# Altium PCB Copy of DigitalLabBoard_Jig_Milling.PcbDoc
Units mil, origin at the board's own origin, x right, y up, seen from the top; angles counter-clockwise.
Board outline 6102.36 x 4133.86 mil, 2 copper layers (Top Layer, Bottom Layer), stack 61.855 mil thick; 17 components, 0 nets, 110 pads, 0 vias.
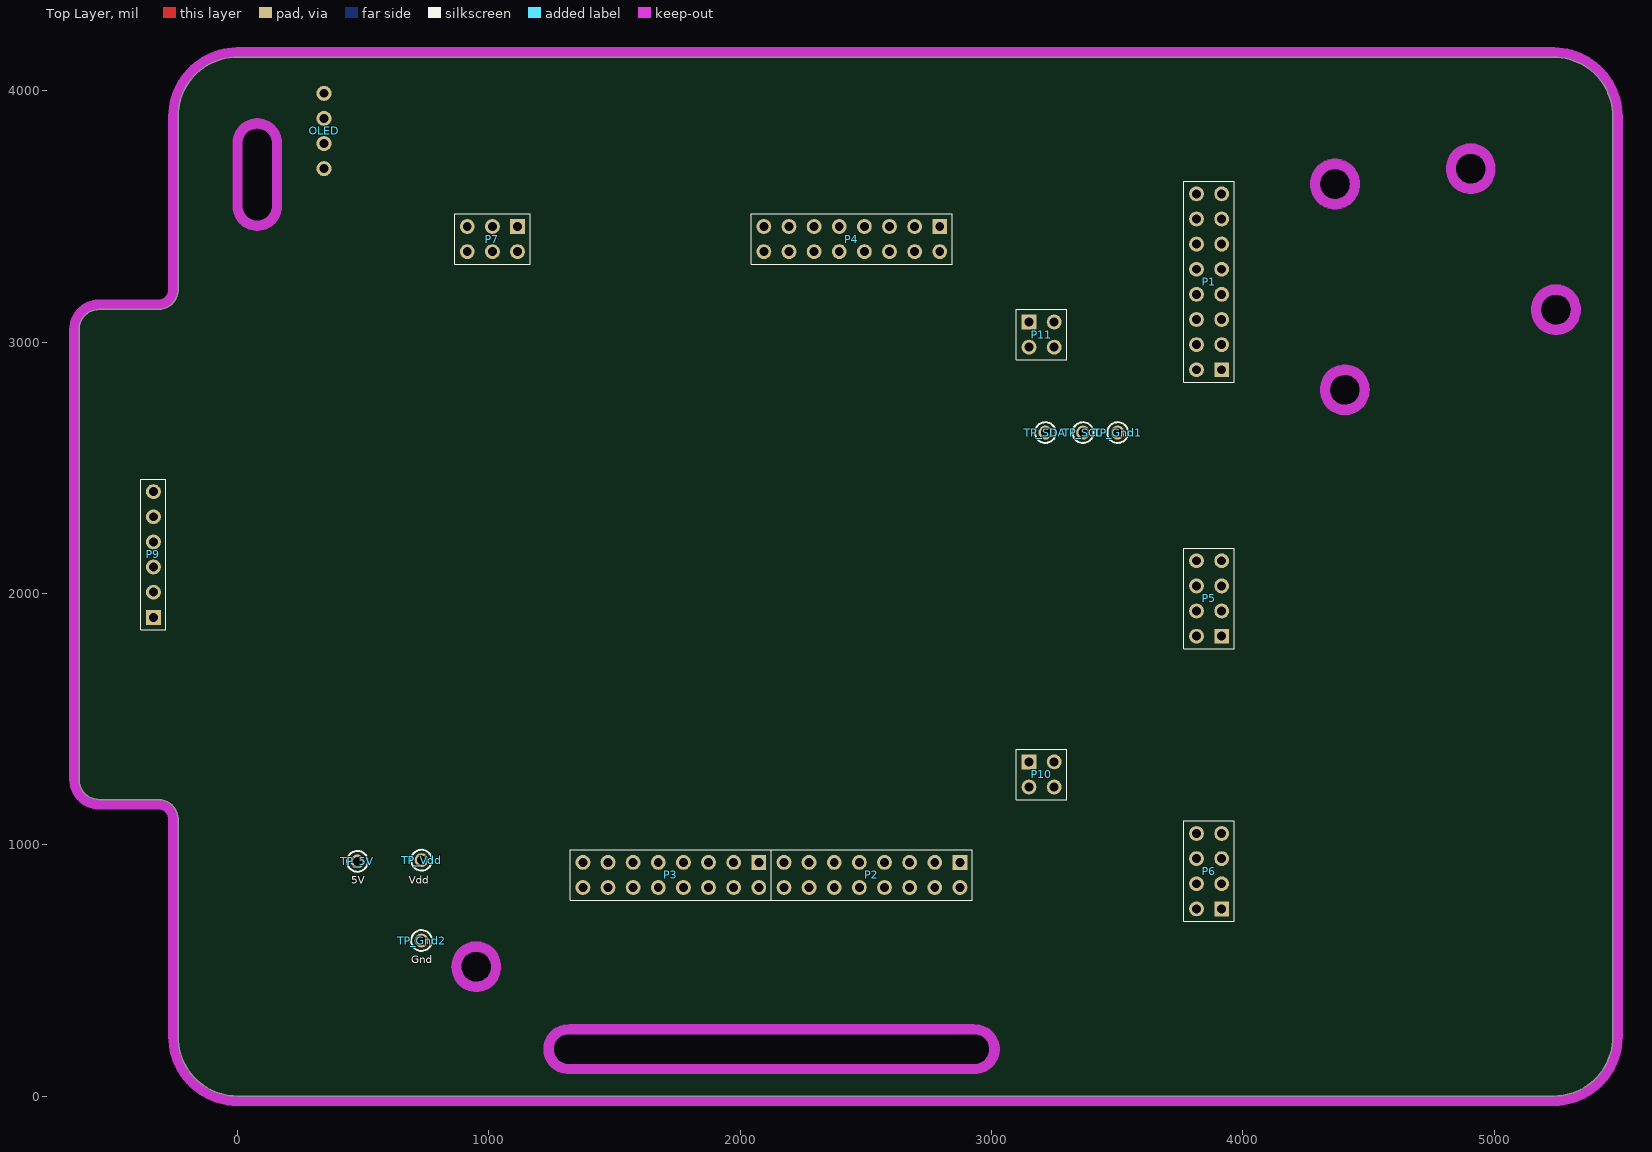
[diagram p0: Top Layer view]
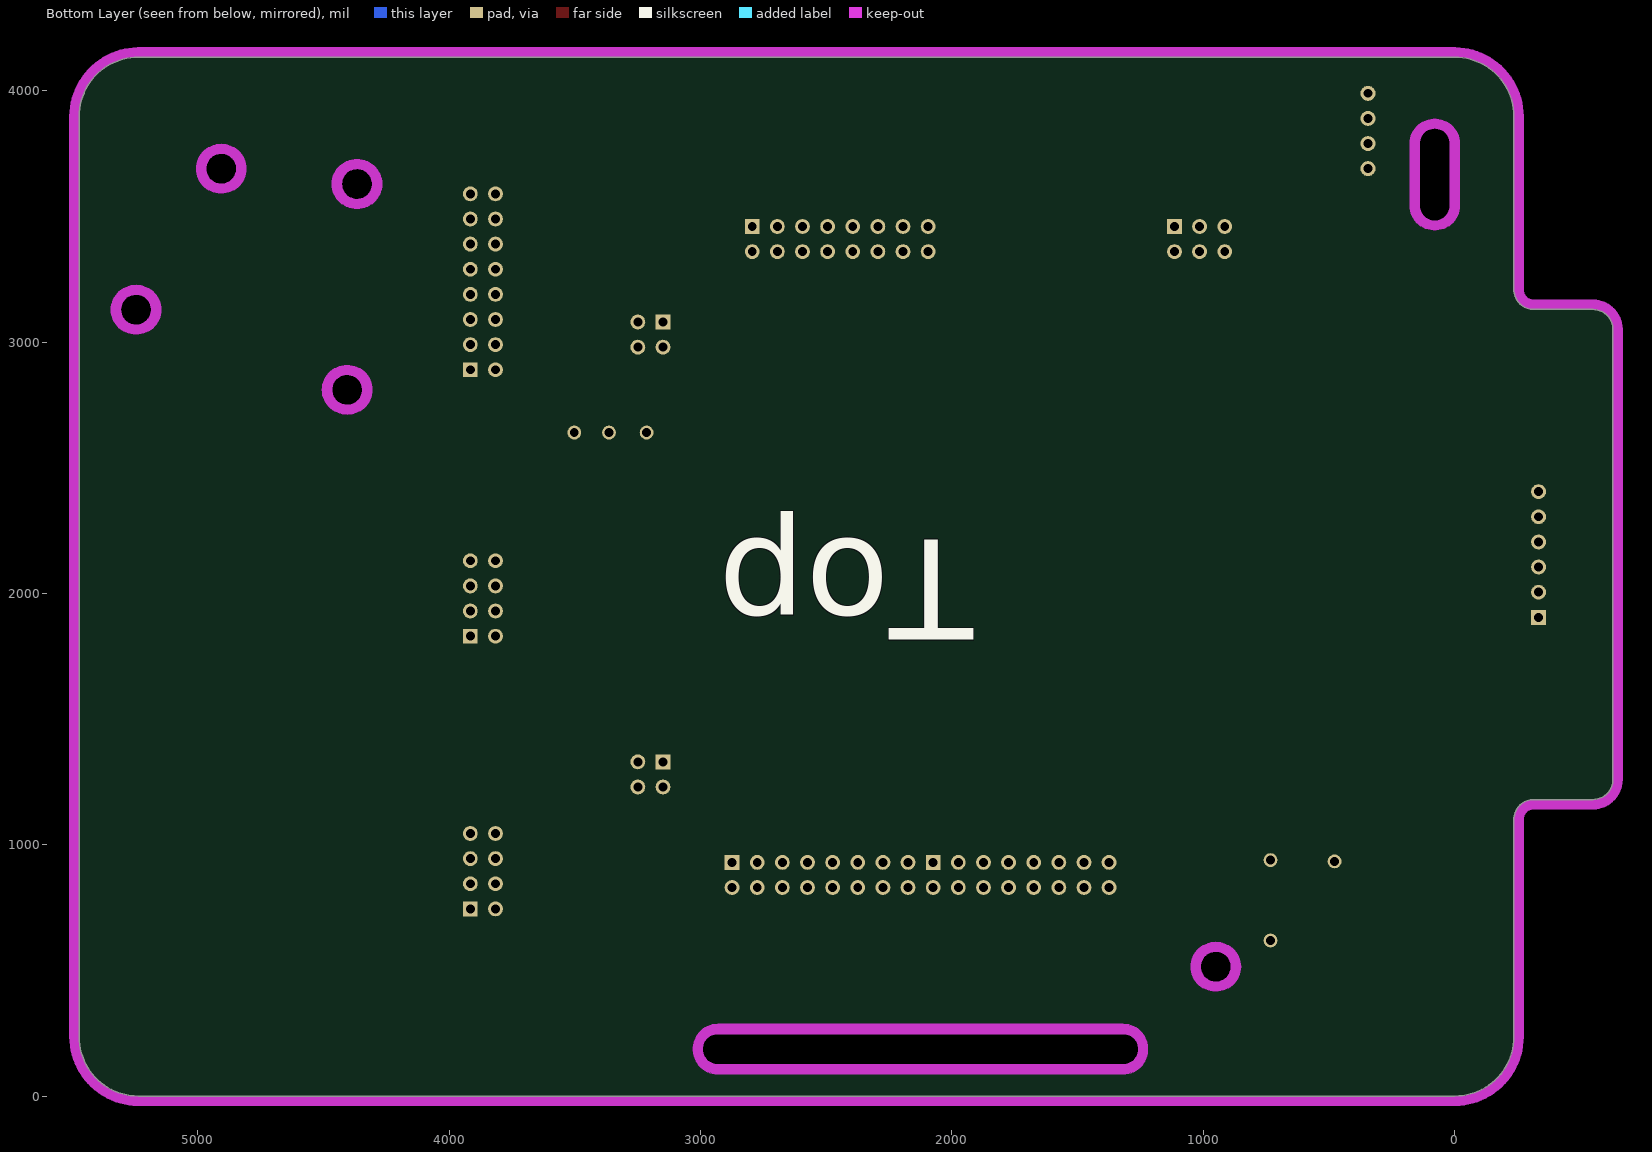
[diagram p1: Bottom Layer view, seen from below]

## Layer stack, top to bottom
Top Solder: solder mask 0.4, Solder Resist, Dk 3.5
Top Layer: signal copper 1.4
Dielectric 1: dielectric 59.0551, FR-4, Dk 4.8
Bottom Layer: signal copper 1.4
Bottom Solder: solder mask 0.4, Solder Resist, Dk 3.5

## Board outline
-236.22,236.22 -236.22,1101.26 ccw(c-314.96,1101.26) -314.96,1180 -551.18,1180 cw(c-551.18,1258.74) -629.92,1258.74 -629.92,3051.18 cw(c-551.18,3051.18) -551.18,3129.92 -314.96,3129.92 ccw(c-314.96,3208.66) -236.22,3208.66 -236.22,3897.64 cw(c0,3897.64) 0,4133.86 0,4133.81 5236.22,4133.81 cw(c5236.22,3897.59) 5472.44,3897.59 5472.44,236.22 cw(c5236.22,236.22) 5236.22,0 0,0 cw(c0,236.22)
cut-out: -19.68,3543.31 ccw(c78.74,3543.31) 177.17,3543.31 177.17,3789.96 ccw(c78.74,3789.96) -19.68,3789.96
cut-out: 1318,88.57 cw(c1318,187) 1318,285.43 2932,285.43 cw(c2932,187) 2932,88.57
cut-out: 4307.57,2810 ccw(c4406,2810) 4406,2711.57 ccw(c4406,2810) 4504.43,2810 ccw(c4406,2810) 4406,2908.43 ccw(c4406,2810)
cut-out: 5147.57,3129 ccw(c5246,3129) 5246,3030.57 ccw(c5246,3129) 5344.43,3129 ccw(c5246,3129) 5246,3227.43 ccw(c5246,3129)
cut-out: 4808.57,3690 ccw(c4907,3690) 4907,3591.57 ccw(c4907,3690) 5005.43,3690 ccw(c4907,3690) 4907,3788.43 ccw(c4907,3690)
cut-out: 4268.57,3629 ccw(c4367,3629) 4367,3530.57 ccw(c4367,3629) 4465.43,3629 ccw(c4367,3629) 4367,3727.43 ccw(c4367,3629)
cut-out: 851.57,515 ccw(c950,515) 950,416.57 ccw(c950,515) 1048.43,515 ccw(c950,515) 950,613.43 ccw(c950,515)

## Design rules (kind name [scope] priority, off if disabled: settings)
BoardOutlineClearance [All] p1: gap=15 ignorepadtopadclearanceinfootprint=FALSE
Clearance [All] p1: gap=5 ignorepadtopadclearanceinfootprint=FALSE
DiffPairsRouting [All] p1: maxlimit=5 minlimit=5 mostfreqgap=5 toplayer_minwidth=10 toplayer_maxwidth=10 toplayer_prefwidth=10 bottomlayer_minwidth=10 bottomlayer_maxwidth=10 bottomlayer_prefwidth=10 maxuncoupledlength=500
HoleSize [All] p1: absolutevalues=TRUE maxlimit=787.4 minlimit=9.84 maxpercent=80.000 minpercent=20.000
MinimumAnnularRing [All] p1: minimumring=3.5
MinimumSolderMaskSliver [All] p1 off: minsoldermaskwidth=10
PolygonConnect PolygonConnect_Via [IsVia] p1: connectstyle=Direct reliefconductorwidth=10 reliefentries=4 polygonreliefangle="90 Angle" airgapwidth=10
PolygonConnect [All] p2: connectstyle=Relief reliefconductorwidth=10 reliefentries=4 polygonreliefangle="90 Angle" airgapwidth=10
RoutingVias [All] p1: holewidth=28 width=50 viastyle="Through Hole" minholewidth=28 minwidth=50 maxholewidth=28 maxwidth=50
SilkToSilkClearance [All] p1 off: silktosilkclearance=10
SilkToSolderMaskClearance [IsPad] p1 off: minsilkscreentomaskgap=10 clearancetoexposedcopper=TRUE
SolderMaskExpansion [All] p1: expansion=4
Width [All] p1: maxlimit=30 minlimit=10 preferedwidth=10
25 further rules are at their usual default settings.

## Classes and differential pairs
differential pair USBD_R: +"" -""
differential pair USBD: +"" -""

## Components (designator, comment, footprint, x,y, rotation, side; value= is the part's Value field where it differs from the comment)
OLED "OLED_Display" OLED_DISPLAY_128X32 344.42,3989.96 r0 top locked
P1 "Header 2x8" HDR2X8S 3915.99,2889.96 r90 top locked
P2 "Header 2x8" HDR2X8S 2874.42,929.96 r180 top locked
P3 "Header 2x8" HDR2X8S 2074.42,929.96 r180 top locked
P4 "Header 2x8" HDR2X8S 2794.42,3459.96 r180 top locked
P5 "Header 2x4" HDR2X4S 3915.99,1829.96 r90 top locked
P6 "Header 2x4" HDR2X4S 3915.99,744.96 r90 top locked
P7 "Header 2x3" HDR2X3S 1114.42,3459.96 r180 top locked
P9 "Header, 6-Pin" HDR1X6S -334.33,1904.96 r90 top locked
P10 "Header 2x2" HDR2X2S 3149.42,1329.96 r270 top locked
P11 "Header 2x2" HDR2X2S 3149.42,3079.96 r270 top locked
TP_5V "5V" "PCBPIN - 0.9mm" 477.42,933.96 r0 top
TP_Gnd1 "Gnd" "PCBPIN - 0.9mm" 3502.33,2640 r90 top locked
TP_Gnd2 "Gnd" "PCBPIN - 0.9mm" 732.42,618.96 r0 top
TP_SCL "SCL" "PCBPIN - 0.9mm" 3364.42,2640 r90 top locked
TP_SDA "SDA" "PCBPIN - 0.9mm" 3214.42,2640 r90 top locked
TP_Vdd "Vdd" "PCBPIN - 0.9mm" 732.42,938.96 r90 top

## Footprints (in the part's own frame and the unit in brackets; to place one, negate y for a bottom-side part, rotate by r counter-clockwise, add the part's x,y. Pads: shape width x height; smd on the part's side, far side on the other; paste and mask are expansions set on the pad)
HDR1X6S [mm] "Header; 6 Position; Straight"
  rect 1.5x1.5 hole 0.9: 1(0,0)
  round 1.5 hole 0.9: 2(2.54,0) 3(5.08,0) 4(7.62,0) 5(10.16,0) 6(12.7,0)
  silkscreen extent -1.27,-1.27 13.97,1.27, body extent -1.27,-1.27 13.97,1.27, height 6
HDR2X2S [mm] "Header; 2x2 Position; Straight"
  rect 1.5x1.5 hole 0.9: 1(0,0)
  round 1.5 hole 0.9: 2(0,2.54) 3(2.54,0) 4(2.54,2.54)
  silkscreen extent -1.27,-1.27 3.81,3.81, body extent -1.27,-1.27 3.81,3.81, height 6
HDR2X3S [mm] "Connector; Header; 2x3 Position; Straight"
  rect 1.5x1.5 hole 0.9: 1(0,0)
  round 1.5 hole 0.9: 2(0,2.54) 3(2.54,0) 4(2.54,2.54) 5(5.08,0) 6(5.08,2.54)
  silkscreen extent -1.27,-1.27 6.35,3.81, body extent -1.27,-1.27 6.35,3.81, height 6
HDR2X4S [mm] "Connector; Header; 2x4 Position; Straight"
  rect 1.5x1.5 hole 0.9: 1(0,0)
  round 1.5 hole 0.9: 2(0,2.54) 3(2.54,0) 4(2.54,2.54) 5(5.08,0) 6(5.08,2.54) 7(7.62,0) 8(7.62,2.54)
  silkscreen extent -1.27,-1.27 8.89,3.81, body extent -1.27,-1.27 8.89,3.81, height 6
HDR2X8S [mm] "Connector; Header; 2x8 Position; Straight"
  rect 1.5x1.5 hole 0.9: 1(0,0)
  round 1.5 hole 0.9: 2(0,2.54) 3(2.54,0) 4(2.54,2.54) 5(5.08,0) 6(5.08,2.54) 7(7.62,0) 8(7.62,2.54) 9(10.16,0) 10(10.16,2.54) 11(12.7,0) 12(12.7,2.54) 13(15.24,0) 14(15.24,2.54) 15(17.78,0) 16(17.78,2.54)
  silkscreen extent -1.27,-1.27 19.05,3.81, body extent -1.27,-1.27 19.05,3.81, height 6
OLED_DISPLAY_128X32 [mil] "Small OLED Display"
  round 60 hole 35.43: 1(0,-300) 2(0,-200) 3(0,-100) 4(0,0)
  body extent -61,-388 1437,86, height 157
"PCBPIN - 0.9mm" [mm]
  round 1.4 hole 0.9: 1(0,0)
  silkscreen extent -1.05,-1.05 1.05,1.05, body extent -1.27,-1.27 1.27,1.27, height 6

## Part data
OLED: "OLED Display 128x32 pixels, I2C interface"
P9: library part "Header 1x6", Digikey=A26512-06-ND, LatestRevisionDate=17-Jul-2002, LatestRevisionNote="Re-released for DXP Platform.", Publisher="Altium Limited"
TP_5V TP_Gnd1 TP_Gnd2 TP_SCL TP_SDA TP_Vdd: library part TP, "Test Point"
P1 P2 P3 P4: Digikey=A26528-08-ND
P5 P6: Digikey=A26528-04-ND
P7: Digikey=A26528-03-ND
P10 P11: Digikey=A26528-02-ND

## Nets (pads, with @x,y where several pads share a name; then routed paths per layer and width w, separated by ;. In a path a pad name is that pad's centre, name@x,y a point inside that pad or via, vN(x,y) a via of type N, cw(c..) or ccw(c..) an arc to the next point about the centre after c; other vN are vias at no path point)
pads on no net: OLED.1 OLED.2 OLED.3 OLED.4 P1.1 P1.2 P1.3 P1.4 P1.5 P1.6 P1.7 P1.8 P1.9 P1.10 P1.11 P1.12 P1.13 P1.14 P1.15 P1.16 P2.1 P2.2 P2.3 P2.4 P2.5 P2.6 P2.7 P2.8 P2.9 P2.10 P2.11 P2.12 P2.13 P2.14 P2.15 P2.16 P3.1 P3.2 P3.3 P3.4 P3.5 P3.6 P3.7 P3.8 P3.9 P3.10 P3.11 P3.12 P3.13 P3.14 P3.15 P3.16 P4.1 P4.2 P4.3 P4.4 P4.5 P4.6 P4.7 P4.8 P4.9 P4.10 P4.11 P4.12 P4.13 P4.14 P4.15 P4.16 P5.1 P5.2 P5.3 P5.4 P5.5 P5.6 P5.7 P5.8 P6.1 P6.2 P6.3 P6.4 P6.5 P6.6 P6.7 P6.8 P7.1 P7.2 P7.3 P7.4 P7.5 P7.6 P9.1 P9.2 P9.3 P9.4 P9.5 P9.6 P10.1 P10.2 P10.3 P10.4 P11.1 P11.2 P11.3 P11.4 TP_5V.1 TP_Gnd1.1 TP_Gnd2.1 TP_SCL.1 TP_SDA.1 TP_Vdd.1

## Polygon pours and split planes (outlines as drawn)
no net on Top Layer "Top Layer-No Net" (solid, pour order 15): 3430.42,489.17
no net on Multi-Layer (solid): -949.4,2486.85

## Keep-outs
Keep-Out Layer:
  circle w39.37: c4907,3690 r78.74
  circle w39.37: c4367,3629 r78.74
  circle w39.37: c4406,2810 r78.74
  circle w39.37: c5246,3129 r78.74
  circle w39.37: c950,515 r78.74
  lines w39.37: 5236.22,4153.5 cw(c5236.22,3897.59) 5492.13,3897.59 5492.13,236.22 cw(c5236.22,236.22) 5236.22,-19.69 0,-19.68 cw(c0,236.22) -255.91,236.22 -255.91,1101.26 ccw(c-314.96,1101.26) -314.96,1160.31 -551.18,1160.31 cw(c-551.18,1258.74) -649.61,1258.74 -649.61,3051.18 cw(c-551.18,3051.18) -551.18,3149.61 -314.96,3149.61 ccw(c-314.96,3208.66) -255.91,3208.66 -255.91,3897.64 cw(c0,3897.64) 0,4153.54 5236.22,4153.54 ; 0,3543.31 ccw(c78.74,3543.31) 157.48,3543.31 157.48,3789.96 ccw(c78.74,3789.96) 0,3789.96 0,3543.31 ; 1318,108.26 cw(c1318,187) 1318,265.74 2932,265.74 cw(c2932,187) 2932,108.26 1318,108.26

## Silkscreen, mask and mechanical layers (free items; w line width, h text height)
Bottom Overlay:
  text "Top" at 1915,2213 h400 r180
Mechanical 15:
  lines w10: 1249.42,664.96 3009.42,664.96 ; 3860.99,3239.96 4735.99,3239.96 ; 3895.99,1979.96 5025.99,1979.96 ; 4000.99,894.96 4685.99,894.96 ; 4770.99,894.96 4970.99,894.96 ; 4775.99,3239.96 4875.99,3239.96 ; 4825.99,3189.96 4825.99,3289.96 ; 4870.99,794.96 4870.99,994.96